# Altium PCB EAX300_TesterControlBoard.PcbDoc
Units mil, origin at the board's own origin, x right, y up, seen from the top; angles counter-clockwise.
Board outline 4500 x 2900 mil, 2 copper layers (Top Layer, Bottom Layer); 35 components, 34 nets, 129 pads, 0 vias.
Unrouted connection lines stored in the file: 45.
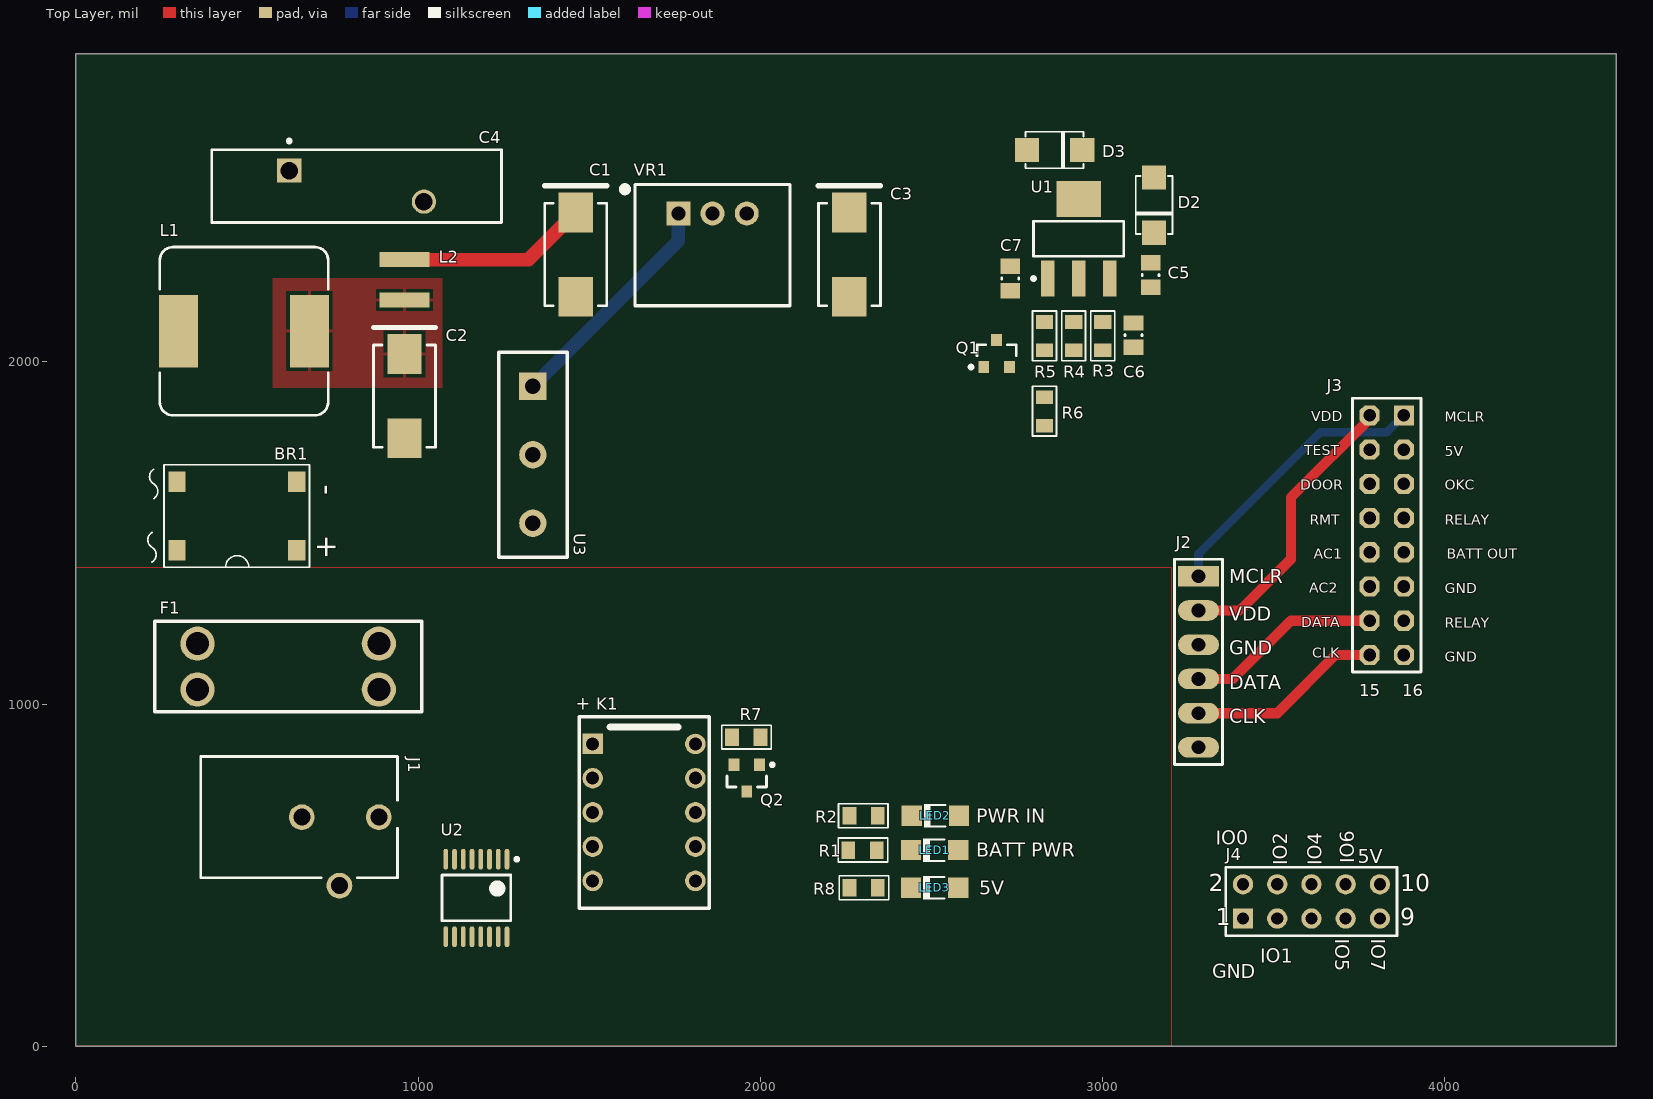
[diagram p0: Top Layer view]
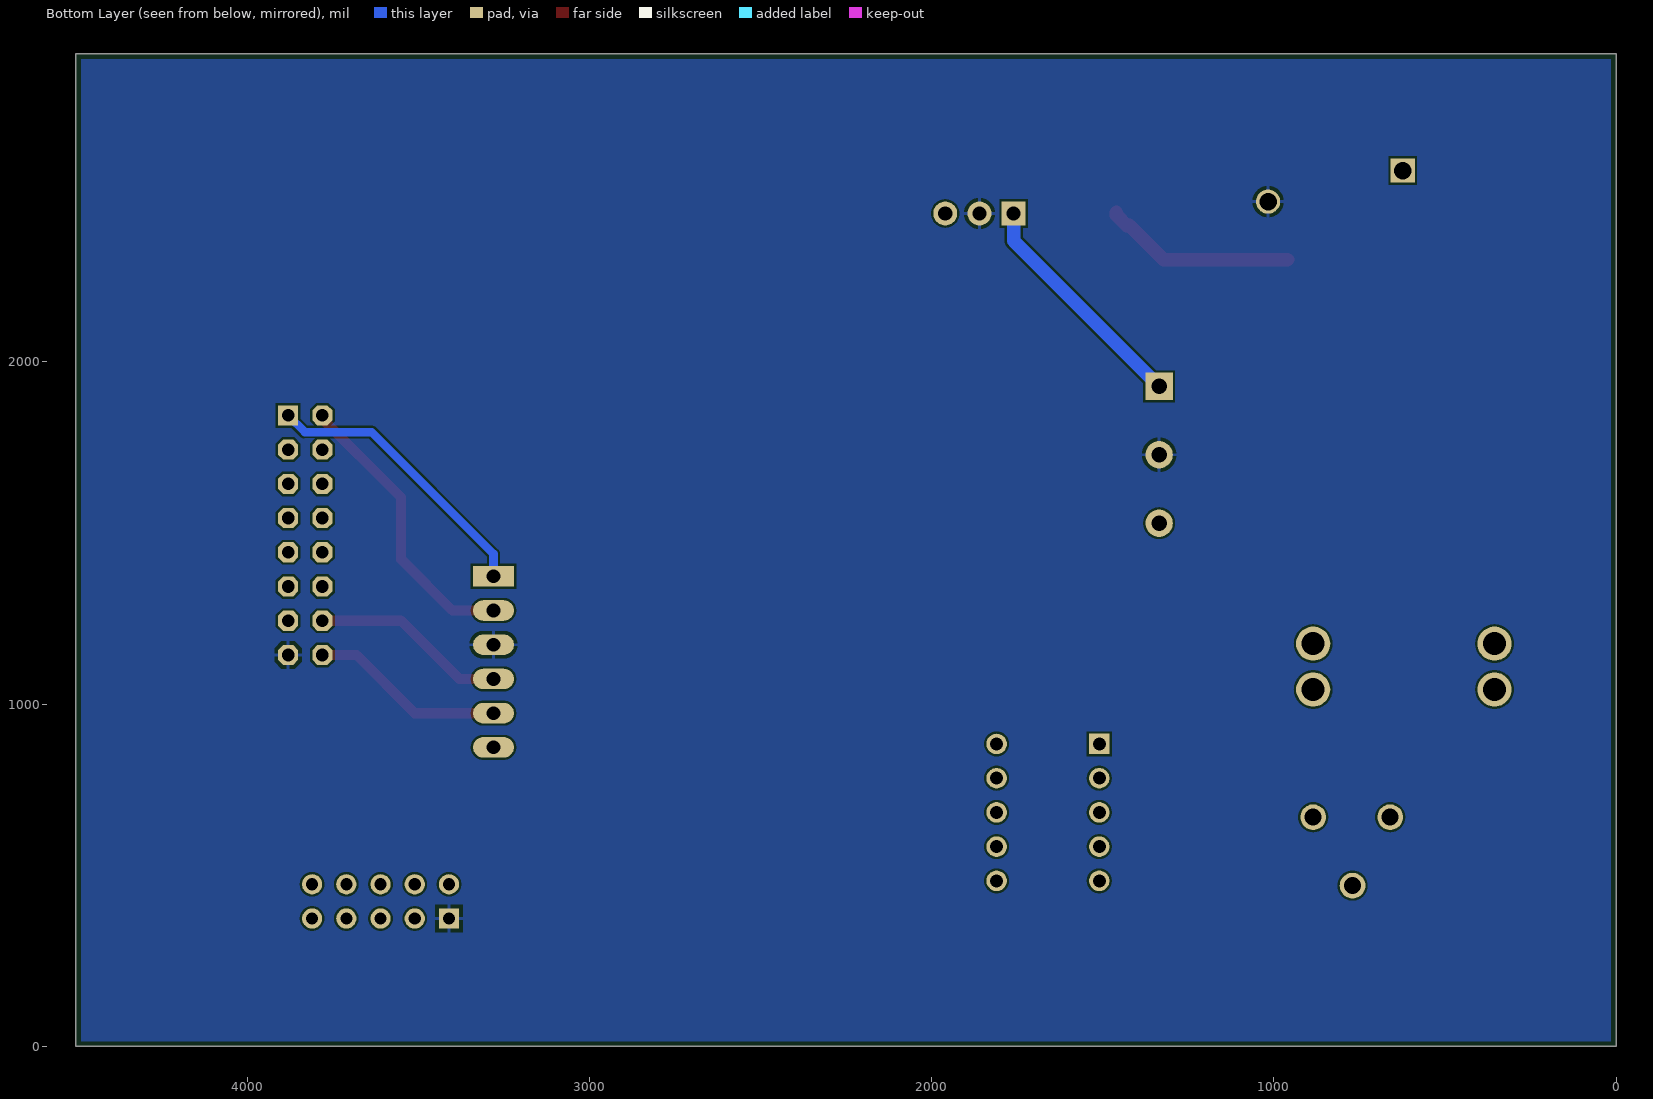
[diagram p1: Bottom Layer view, seen from below]

## Layer stack, top to bottom
Top Solder: solder mask 0.4, Solder Resist, Dk 3.5
Top Layer: signal copper 1.4
Dielectric 1: dielectric 12.6, FR-4, Dk 4.8
Bottom Layer: signal copper 1.4
Bottom Solder: solder mask 0.4, Solder Resist, Dk 3.5

## Board outline
0,0 4500,0 4500,2900 0,2900

## Design rules (kind name [scope] priority, off if disabled: settings)
BoardOutlineClearance [All] p1: gap=15 ignorepadtopadclearanceinfootprint=FALSE
Clearance [All] p1: gap=6 ignorepadtopadclearanceinfootprint=FALSE
ComponentClearance [All] p1 off: gap=10 collisioncheckmode=3 verticalgap=10 showdistances=FALSE
Height [All] p1 off: minheight=0 maxheight=1000 prefheight=500
PolygonConnect [All] p1: connectstyle=Relief reliefconductorwidth=10 reliefentries=4 polygonreliefangle="90 Angle" airgapwidth=10
RoutingVias [All] p1: holewidth=28 width=50 viastyle="Through Hole" minholewidth=28 minwidth=50 maxholewidth=28 maxwidth=50
SilkToSilkClearance [All] p1 off: silktosilkclearance=10
SolderMaskExpansion [All] p1: expansion=4
Width [All] p1: maxlimit=300 minlimit=6 preferedwidth=12
27 further rules are at their usual default settings.

## Components (designator, comment, footprint, x,y, rotation, side; value= is the part's Value field where it differs from the comment)
BR1 "1A" BRIDGE_1A_SMT 645,1450 r270 top
C1 "10uF" KEMT-D-7343-31-2_M 1460,2313.86 r270 top
C2 "10uF" KEMT-D-7343-31-2_M 960,1900 r270 top
C3 "22uF" KEMT-D-7343-31-2_M 2260,2313.86 r270 top
C4 "B72220S1300K102" TDK-S20K275 820,2513.86 r0 top
C5 "1uF" CAPC0805(2012)75_N 3140,2253.86 r270 top
C6 "0.1uF" CAPC0805(2012)75_N 3090,2078.43 r270 top value=1uF
C7 "0.1uF" CAPC0805(2012)75_N 2730,2243.86 r90 top value=1uF
D2 "1N4002" DO-214AC 3150,2458.86 r270 top value={Value}
D3 "1N4002" DO-214AC 2859,2618.86 r0 top value={Value}
F1 "PC Auto Fuse Holder" "AUTO-FUSE HOLDER" 620,1110 r0 top
J1 "Power In" KLD-0202_2 660,670 r0 top
J2 "PicKit3" HDR1X6 3280,1373.86 r270 top
J3 "Header 8X2" HDR2X8 3880,1843.86 r270 top
J4 "HMI CONN" HDR2X5 3410,373.86 r0 top
K1 "QW POWER" AZ_940 1510,883.86 r0 top
L1 "82uH" BOUR-SRR1280-2_V 490.94,2090 r0 top
L2 "12uH 1.4A" "WE-LQS 4018" 960,2240 r90 top
LED1 "BATT PWR" LED_1206_2 2577.8,573.86 r180 top
LED2 "PWR IN" LED_1206_2 2580,673.86 r180 top
LED3 "5V" LED_1206_2 2577.8,463.86 r180 top
Q1 "MMBT2222" ONSC-SOT-23-3-318-08_V 2690,2024.49 r90 top
Q2 "MMBT2222" ONSC-SOT-23-3-318-08_V 1960,783.86 r270 top
R1 "0805" RES_0805 2257,573.86 r0 top value=1K
R2 "0805" RES_0805 2343,673.86 r180 top value=3.3K
R3 "0805" RES_0805 3000,2033.86 r90 top value=348
R4 "0805" RES_0805 2915,2033.86 r90 top value=2K
R5 "0805" RES_0805 2830,2033.86 r90 top value=6.04K
R6 "0805" RES_0805 2830,1813.86 r90 top value=1K
R7 "0805" RES_0805 1917,903.86 r0 top value=1K
R8 "0805" RES_0805 2260,463.86 r0 top value=1K
U1 "LM317AT" SOT223_M 2930,2360 r90 top
U2 "ADG1636BRUZ" ADI-RU-16_N 1170,433.86 r270 top
U3 "7812" 7812 1335,1928.86 r270 top
VR1 "VX7805-1000" 78XX 1860,2433.86 r0 top

## Footprints (in the part's own frame and the unit in brackets; to place one, negate y for a bottom-side part, rotate by r counter-clockwise, add the part's x,y. Pads: shape width x height; smd on the part's side, far side on the other; paste and mask are expansions set on the pad)
78XX [mil] "3-Pin Voltage Regulator"
  rect 70x70 hole 41: 1(-100,0)
  round 70 hole 41 unplated: 2(0,0) 3(100,0)
  silkscreen extent -264,-270 226,85, body extent -226,-268 226,86, height 691
7812 [mil] "3-PIN VOLTAGE REGULATOR"
  rect 80x80 hole 45: 1(0,0)
  round 80 hole 45: 2(200,0) 3(400,0)
  silkscreen extent -100,-100 500,100
ADI-RU-16_N [mm] "SOP, 16-Leads, Body 5x4.4mm, Pitch 0.65mm, IPC Medium Density"
  oval 1.55x0.35 smd: 1(-2.875,2.275) 2(-2.875,1.625) 3(-2.875,0.975) 4(-2.875,0.325) 5(-2.875,-0.325) 6(-2.875,-0.975) 7(-2.875,-1.625) 8(-2.875,-2.275) 9(2.875,-2.275) 10(2.875,-1.625) 11(2.875,-0.975) 12(2.875,-0.325) 13(2.875,0.325) 14(2.875,0.975) 15(2.875,1.625) 16(2.875,2.275)
  silkscreen extent -3,-2.55 1.7,3.13, body extent -2.25,-2.55 2.25,2.55, height 1.2
"AUTO-FUSE HOLDER" [mil]
  round 100 hole 67: 1(-265,-67) 2(-265,67) 3(265,67) 4(265,-67)
  silkscreen extent -390,-132 390,132
AZ_940 [mil]
  rect 60x60 hole 38: 1(0,0)
  round 60 hole 38: 2(0,-100) 3(0,-200) 4(0,-300) 5(0,-400) 6(300,-400) 7(300,-300) 8(300,-200) 9(300,-100) 10(300,0)
  silkscreen extent -40,-480 340,80
BOUR-SRR1280-2_V [mm] "SMD, 2-Leads, Body 12.5x12.5mm"
  rect 2.9x5.4 smd: 1(-4.85,0) 2(4.85,0)
  silkscreen extent -6.25,-6.25 6.25,6.25, body extent -6.25,-6.25 6.25,6.25, height 7.51
BRIDGE_1A_SMT [mil]
  rect 60x50 smd: 1(0,0) 2(-200,0) 3(-200,-350) 4(0,-350)
  silkscreen extent -250,-435 50,38
CAPC0805(2012)75_N [mm] "Chip Capacitor, Body 2.0x1.2mm, Height 0.75mm, IPC Medium Density"
  rect 1.15x1.45 smd: 1(-0.9,0) 2(0.9,0)
  silkscreen extent -0.05,-0.62 0.05,0.63, body extent -1.51,-0.72 1.49,0.73, height 0.75
DO-214AC [mil]
  rect 71x70 smd: +(-80.39,0) -(81,0)
  silkscreen extent -85,-53 85,54
HDR1X6 [mil] "Connector; Header; 6 Position"
  rect 60x120 hole 40: 1(0,0)
  oval 60x120 hole 40: 2(100,0) 3(200,0) 4(300,0) 5(400,0) 6(500,0)
  silkscreen extent -50,-70 550,70
HDR2X5 [mm] "Connector; Header; 5x2 Position"
  rect 1.5x1.5 hole 0.9: 1(0,0)
  round 1.5 hole 0.9: 2(0,2.54) 3(2.54,0) 4(2.54,2.54) 5(5.08,0) 6(5.08,2.54) 7(7.62,0) 8(7.62,2.54) 9(10.16,0) 10(10.16,2.54)
  silkscreen extent -1.27,-1.27 11.43,3.81
HDR2X8 [mm]
  rect 1.5x1.5 hole 0.94: 1(0,0)
  oct 1.5x1.5 hole 0.94: 2(0,-2.54) 3(2.54,0) 4(2.54,-2.54) 5(5.08,0) 6(5.08,-2.54) 7(7.62,0) 8(7.62,-2.54) 9(10.16,0) 10(10.16,-2.54) 11(12.7,0) 12(12.7,-2.54) 13(15.24,0) 14(15.24,-2.54) 15(17.78,0) 16(17.78,-2.54)
  silkscreen extent -1.27,-3.81 19.05,1.27
KEMT-D-7343-31-2_M [mm] "Molded TAN Capacitor, 2-Leads, Body 7.6x4.6mm, IPC Low Density"
  rect 2.95x2.55 smd: 1(-3.125,0) 2(3.125,0)
  silkscreen extent -5.1,-2.3 3.8,2.3, body extent -3.8,-2.3 3.8,2.3, height 3.1
KLD-0202_2 [mil] "DC Power Jack, 2.5mm, KLD Series, PCB Mount"
  round 75 hole 50: 1(225,0) 2(0,0) 3(110,-200)
  silkscreen extent -295,-177 280,177, body extent -339,-199 260,171, height 433
LED_1206_2 [mm]
  rect 1.5x1.5 smd: 1(0,0) 2(3.5,0)
  silkscreen extent 1,-0.87 2.6,0.88, body extent 0.27,-0.8 3.48,0.8, height 1.11
ONSC-SOT-23-3-318-08_V [mm] "SOT23, 3-Leads, Body 2.92x1.3mm, Pitch 0.95mm"
  rect 0.9x0.8 smd: 1(-1,0.95) 2(-1,-0.95) 3(1,0)
  silkscreen extent -1.12,-1.46 0.65,2.02, body extent -0.65,-1.46 0.65,1.46, height 1.11
RES_0805 [mil]
  rect 40x51 smd: 1(0,0) 2(83,0)
  silkscreen extent -30,-35 115,35
SOT223_M [mm] "SOT223, 4-Leads, Body 6.5x3.5mm, Pitch 2.3mm, Lead Span 7mm, IPC Low Density"
  rect 2.7x1 smd: 1(-2.95,2.3) 2(-2.95,0) 3(-2.95,-2.3)
  rect 2.7x3.3 smd: 4(2.95,0)
  silkscreen extent -3.07,-3.35 1.3,3.47, body extent -1.85,-3.35 1.85,3.35, height 1.7
TDK-S20K275 [mm] "THD, 2-Leads, Dia 21.5mm"
  rect 1.8x1.8 hole 1.3 unplated: 1(-5,1.15)
  round 1.8 hole 1.3 unplated: 2(5,-1.15)
  silkscreen extent -10.75,-2.7 10.75,3.47, body extent -10.75,-2.7 10.75,2.7, height 24.5
"WE-LQS 4018" [mm] "SMD Power Inductor, 2-Leads, Body 4.0x4.0mm"
  rect 1.1x3.7 smd: 1(-1.5,0) 2(1.5,0)
  body extent -2,-2 2,2, height 1.78

## Part data
BR1: library part Bridge1, "Full Wave Diode Bridge", DatasheetVersion=E2732B, LatestRevisionDate=29-May-2009, LatestRevisionNote="Sch pins A & K swapped.", PackageDescription="Bridge Rectifier; 4 Terminals; Body 9.4 x 9.4 mm (typ); Pitch 5.08 mm", PackageReference=D-38, Published=8-Jun-2000, Publisher="Altium Limited"
C1 C2: library part CMP-2000-05176-1, "Capacitor, Tantalum, 10 uF, +/- 10%, 50 V, -55 to 125 degC, 2-Pin SMD, RoHS, Tape and Reel", MFR=AVR, Operating Temp Range=-55Cto125C, Tolerance (+ or -)=20%, Voltage=50VDC, Capacitance=10uF, ESR=90mOhm, Mounting Style=SurfaceMount, Packaging=TapeandReel, Polarity=Polar
C3: library part CMP-2000-05176-1, "Capacitor, Tantalum, 22 uF, +/- 10%, 6.3V, -55 to 125 degC, 2-Pin SMD, RoHS, Tape and Reel", Manufacturer=Kemet, MFR=AVX, MFR P/N=TCQB226M006R0070E, Package / Case=2510, Tolerance (+ or -)=10%, Voltage=6.3VDC, Capacitance=22uF, Construction=SMTChip, ESR=70Ohm, Manufacturer URL=http://www.kemet.com/, Mounting Style=SurfaceMount, Polarity=Polar
C4: library part CMP-2000-05911-1, "Leaded Varistor, 850 pF, 275 Vrms, 8 KA, -40 to 85 degC, 2-Pin THD, RoHS, Bulk", MFR=TDK, Package Reference=S20K275, Manufacturer URL=http://www.tdk.com/, MFR P/N=B72220S1300K102, Mounting Technology=ThroughHole
C5 C6 C7: library part GRM21BR71H105KA12L, "CAP CER 1UF 50V X7R 0805", Capacitance=1.0µF, Manufacturer="Murata Electronics North America", Operating Temperature="-55°C ~ 125°C", Package / Case="0805 (2012 Metric)", Ratings=-, Supplier Part Number=490-4736-1-ND, Temperature Coefficient=X7R, Tolerance=±10%, Voltage - Rated=50V, .Checked PCB=used, .Checked SCH=used, Applications="General Purpose", Category=Capacitors, ComponentLink1Description=http://search.murata.co.jp/Ceramy/image/img/PDF/ENG/GRM21BR71H105KA12.pdf, ComponentLink1URL=http://search.murata.co.jp/Ceramy/image/img/PDF/ENG/GRM21BR71H105KA12.pdf, Features=-, Height - Seated (Max)=-, Lead Spacing=-, Lead Style=-, Manufacturer Part Number=GRM21BR71H105KA12L, Mounting Type="Surface Mount, MLCC", Packaging="Cut Tape (CT)", Price 1k [$]=0.1359, Pricing 1="1=0.28, 10=0.254, 25=0.226, 50=0.1978, 100=0.1836, 250=0.16952, 500=0.16102, 750=0.14691, 1000=0.12995 (USD)", RoHS="RoHS Compliant", Size / Dimension="0.079\" L x 0.049\" W (2.00mm x 1.25mm)", Stock 1=422791, Supplier=Digikey, Supplier 1=Digi-Key, Supplier Part Number 1=490-4736-1-ND, Thickness (Max)="0.053\" (1.35mm)"
D2 D3: library part 1N4004SMT, "1N4004SMT"
F1: "Fuse Holder 2 IN 1 AUTO BLDE HOLDER", MFR="Keystone Electronics", MPN=3587-10, Amperage=Fuse, ComponentLink1Description=Datasheet, ComponentLink1URL=http://www.mouser.com/ds/2/215/557-10-961412.pdf
J1: library part "Header 3", "Header, 3-Pin", LatestRevisionDate=17-Jul-2002, LatestRevisionNote="Re-released for DXP Platform.", Publisher="Altium Limited"
J2: library part "Header 6", "PicKit3 Connector"
J3: "Header, 8-Pin, Dual row", LatestRevisionDate=17-Jul-2002, LatestRevisionNote="Re-released for DXP Platform.", Publisher="Altium Limited"
J4: library part "Header 5X2", "Header, 5-Pin, Dual row", LatestRevisionDate=17-Jul-2002, LatestRevisionNote="Re-released for DXP Platform.", Publisher="Altium Limited"
K1: library part Relay_1, "AZ850-5", Part Number=101671, ComponentLink1Description=Datasheet, ComponentLink1URL=http://www.azettler.com/pdfs/az850.pdf
L1: library part CMP-2000-07148-1, "Shielded SMD Power Inductor, 82 uH, +/- 20%, -40 to 125 degC, 2-Pin SMD, RoHS, Tape and Reel", DC Current Max=3.5A, DC Resistance Max=57MOhm, Maximum DC Resistance=57mO, Maximum Operating Temperature=+125°C, Maximum Self Resonant Frequency=9.5MHz, MFR=Bourns, MFR P/N=SRR1280-820M, Minimum Operating Temperature=-40°C, Tolerance=20%, Core Material=Ferrite, Inductance=82uH, Manufacturer URL=http://www.bourns.com/, Maximum DC Current=3.5A, Mounting Technology=SurfaceMount, Series=SRR1280
L2: library part CMP-1354-00035-1, "SMD Power Inductor, L=12 µH", Inductance=12µH, MFR=Bourns, MFR P/N=SRN5020TA-120M, ComponentLink1Description="Manufacturer URL", ComponentLink1URL=http://www.we-online.com, ComponentLink2Description=Datasheet, ComponentLink2URL=http://katalog.we-online.de/pbs/datasheet/74404042068.pdf
LED1 LED2 LED3: library part LED3, "Typical BLUE SiC LED", DatasheetVersion=16-Apr-2002, LatestRevisionDate=17-Dec-2003, LatestRevisionNote="PCB Footprint replaced.", PackageDescription="SM LED; 2 C-Bend Leads; Body 3.5 x 2.8 x 1.9 mm, inc leads (LxWxH typ)", PackageReference=3.5X2.8X1.9, PackageVersion=16-Apr-2002, Published=8-Jun-2000, Publisher="Altium Limited"
Q1 Q2: library part CMP-0722-00001-2, "General Purpose Transistor, NPN Silicon, 3-Pin SOT-23, Pb-Free, Tape and Reel", Manufacturer="On Semiconductor", PartNumber=MMBT2222LT1G, ComponentLink1Description="Manufacturer URL", ComponentLink1URL=http://www.onsemi.com/, ComponentLink2Description=Datasheet, ComponentLink2URL=http://www.onsemi.cn/pub_link/Collateral/MMBT2222LT1-D.PDF, ComponentLink3Description="Package Specification", ComponentLink3URL=http://www.onsemi.cn/pub_link/Collateral/318-08.PDF, DatasheetVersion="Rev. 10", fT Min (MHz)=250, IC Continuous (A)=0.6, Mounting Technology="Surface Mount", PackageDescription="3-Pin Small Outline Transistor, Body 2.92 x 1.3 mm, Pitch 0.95 mm", PackageReference=SOT-23-3-318-08, PackageVersion="Rev. AP, 11/2009", Packing="Tape and Reel", Polarity=NPN, RoHS=TRUE
R1 R2 R3 R4 R5 R6 R7 R8: library part "Res Semi", "Semiconductor Resistor", LatestRevisionDate=17-Jul-2002, LatestRevisionNote="Re-released for DXP Platform.", PackageDescription="Axial Device, Thru-Hole; 2 Leads; 0.5 in Pin Spacing", PackageReference=AXIAL-0.5, Published=8-Jun-2000, Publisher="Altium Limited"
U1: library part LM317, "3-Terminal Adjustable Regulator, 3-pin TO-220, Pb-Free", MFR="ON Semiconductor", ComponentLink1Description="LM317 Datasheet", ComponentLink1URL=http://www.national.com/ds/LM/LM317.pdf, ComponentLink2Description="LM317 Web Page", ComponentLink2URL=http://www.national.com/pf/LM/LM317.html, CompType="LDO IC", Parameter 1=LM317MBSTT3G, PinCount=4, RoHS=Y
U2: library part CMP-0790-00227-1, "1 Ohm Typical on Resistance, +/-5 V, +12 V, +5 V, and +3.3 V Dual SPDT Switch, -40 to 125 degC, 16-pin SOP (RU-16), Tube", Manufacturer="Analog Devices", Power Dissipation=4.5mW, Code_JEDEC=MO-153AB, ComponentLink1Description="Manufacturer URL", ComponentLink1URL=http://www.analog.com/en/index.html, ComponentLink2Description=Datasheet, ComponentLink2URL=http://www.analog.com/static/imported-files/data_sheets/ADG1636.pdf, ComponentLink3Description="Package Specification", ComponentLink3URL=http:/www.analog.com/static/imported-files/packages/36244347913743854010197452789RU16.pdf, Configuration=SPDT, DatasheetVersion="Rev. A", Id, Is (ON)="300pA, 300pA, 100pA, 50pA", Is OFF="100pA, 100pA, 50pA, 20pA", Mounting Technology="Surface Mount", PackageDescription="16-Pin Thin Shrink Small Outline Package, Body 5 x 4.4 mm, Pitch 0.65 mm", PackageReference=RU-16, PackageVersion=Nov-02, Packing=Tube, PartNumber=ADG1636BRUZ, Ron (ohms)=1
VR1: library part VX78xx, "Non-Isolated DC Switching Regulator", MFR="CUI, Inc.", ComponentLink1Description=Datasheet, ComponentLink1URL=https://www.cui.com/product/resource/vx78-1000.pdf, MFR P/N=VX7805-1000

## Nets (pads, with @x,y where several pads share a name; then routed paths per layer and width w, separated by ;. In a path a pad name is that pad's centre, name@x,y a point inside that pad or via, vN(x,y) a via of type N, cw(c..) or ccw(c..) an arc to the next point about the centre after c; other vN are vias at no path point)
5V: C3.1 J3.3 J4.10 K1.1 LED3.1 U2.13 VR1.3
12V: C5.1 D2.- U1.3 U3.3
_VDD: K1.8
_VPP: K1.3
BATT_PWR: C6.1 D2.+ D3.- J3.9 LED1.1 R3.2 U1.2 U1.4
GND: BR1.3 C1.2 C2.2 C3.2 C4.2 C5.2 C6.2 C7.2 J2.3 J3.15 J4.1 Q1.2 Q2.2 R1.1 R2.2 R4.1 R8.1 U2.5 U2.6 U3.2 VR1.2
GPIO0: J4.2
GPIO1: J4.3
GPIO2: J4.4 R7.1
GPIO3: J4.5
GPIO4: J4.6
GPIO5: J4.7
GPIO6: J4.8
GPIO7: J4.9
LB_EN: R6.1
NetBR1_2: BR1.2 J1.1 J1.3
NetBR1_4: BR1.4 F1.3 F1.4
NetC1_1: C1.1 L2.2 U3.1 VR1.1 | length 1242.7
  Top Layer w40: L2.2 1322.17,2299.06 1421.93,2398.82 1429.8,2398.82 1460,2429.02 C1.1
  Bottom Layer w40: U3.1 1760,2353.86 VR1.1
NetC2_1: C2.1 L1.2 L2.1
NetC7_1: C7.1 D3.+ R3.1 R4.2 R5.2 U1.1
NetF1_1: F1.1 F1.2 J1.2
NetK1_10: K1.10 Q2.3
NetLED1_2: LED1.2 R1.2
NetLED2_2: LED2.2 R2.1
NetLED3_2: LED3.2 R8.2
NetQ1_1: Q1.1 R6.2
NetQ1_3: Q1.3 R5.1
NetQ2_1: Q2.1 R7.2
PGC: J2.5 J3.16 | length 580.4
  Top Layer w30: J2.5 3510,973.86 3680,1143.86 J3.16@3790,1143.86
PGD: J2.4 J3.14 | length 580.4
  Top Layer w30: J2.4 3380,1073.86 3550,1243.86 J3.14@3790,1243.86
PGM_EN: U2.1 U2.9
PWR_IN: BR1.1 C4.1 L1.1 LED2.1
VDD: J2.2 J3.2 K1.7 | length 851.5
  Top Layer w30: J2.2 3400,1273.86 3550,1423.86 3550,1603.86 J3.2@3790,1843.86
VPP: J2.1 J3.1 K1.4 | length 842.8
  Bottom Layer w25: J2.1 3280,1438.86 3636.14,1795 3831.14,1795 J3.1 J3.1@3890,1843.86
pads on no net: J2.6 J3.4 J3.5 J3.6 J3.7 J3.8 J3.10 J3.11 J3.12 J3.13 K1.2 K1.5 K1.6 K1.9 U2.2 U2.3 U2.4 U2.7 U2.8 U2.10 U2.11 U2.12 U2.14 U2.15 U2.16

## Polygon pours and split planes (outlines as drawn)
NetC2_1 on Top Layer "NETC2_1_L01_P006" (solid, remove dead copper, pour order 6): 575,1925 1070.24,1925 1070.24,2245 575,2245
GND on Top Layer "NONET_L01_P004" (solid, remove dead copper, shelved, pour order 4): 0,0 0,1400 3200,1400 3200,0
no net on Top Layer "NONET_L01_P002" (solid, remove dead copper, shelved, pour order 2): 977.9,106.68
GND on Bottom Layer "GND_L02_P008" (solid, remove dead copper, pour order 8): 5,2895 5,0 4490,0 4490,2905

## Silkscreen, mask and mechanical layers (free items; w line width, h text height)
Top Overlay:
  text "VDD" at 3609.71,1826.81 h30
  text "MCLR" at 4000.16,1825.1 h30
  text "TEST" at 3589.29,1726.86 h30
  text "5V" at 4000.16,1723.86 h30
  text "DOOR" at 3576.72,1626.86 h30
  text "OKC" at 4000.16,1626.86 h30
  text "RMT" at 3605,1523.86 h30
  text "RELAY" at 4000.16,1523.86 h30
  text "AC1" at 3616.28,1425.57 h30
  text "BATT OUT" at 4005,1425 h30
  text "MCLR" at 3370,1353.86 h40
  text "AC2" at 3603.43,1325.57 h30
  text "GND" at 4000.16,1323.86 h30
  text "VDD" at 3370,1243.86 h40
  text "DATA" at 3580.15,1225.57 h30
  text "RELAY" at 4000,1223.86 h30
  text "GND" at 3370,1143.86 h40
  text "CLK" at 3612.86,1135.57 h30
  text "GND" at 4000.16,1123.86 h30
  text "DATA" at 3370,1043.86 h40
  text "15" at 3750,1023.86 h35
  text "16" at 3875,1023.86 h35
  text "CLK" at 3370,943.86 h40
  text "IO0" at 3330,590 h40
  text "IO6" at 3735,535 h40 r90
  text "5V" at 3745,535 h40
  text "IO2" at 3540,530 h40 r90
  text "IO4" at 3640,530 h40 r90
  text "IO5" at 3680,315 h40 r270
  text "IO7" at 3785,315 h40 r270
  text "IO1" at 3460,245 h40
  text "GND" at 3320,200 h40

## Text inside footprints (layer, text, board x,y; h text height)
BR1: Top Overlay "+" at 705,1495 h62.5 r270; Top Overlay "-" at 755,1610 h62.5 r90
J4: Top Overlay "10" at 3870,453.86 h50; Top Overlay "9" at 3870,353.86 h50; Top Overlay "1" at 3330,353.86 h50; Top Overlay "2" at 3310,453.86 h50
K1: Top Overlay "+" at 1460,983.86 h37.5